# Altium PCB 遥控器.PcbDoc
Units mm, origin at the board's own origin, x right, y up, seen from the top; angles counter-clockwise.
Board outline 152.4 x 101.6 mm, 2 copper layers (Top Layer, Bottom Layer); 65 components, 58 nets, 276 pads, 384 vias.
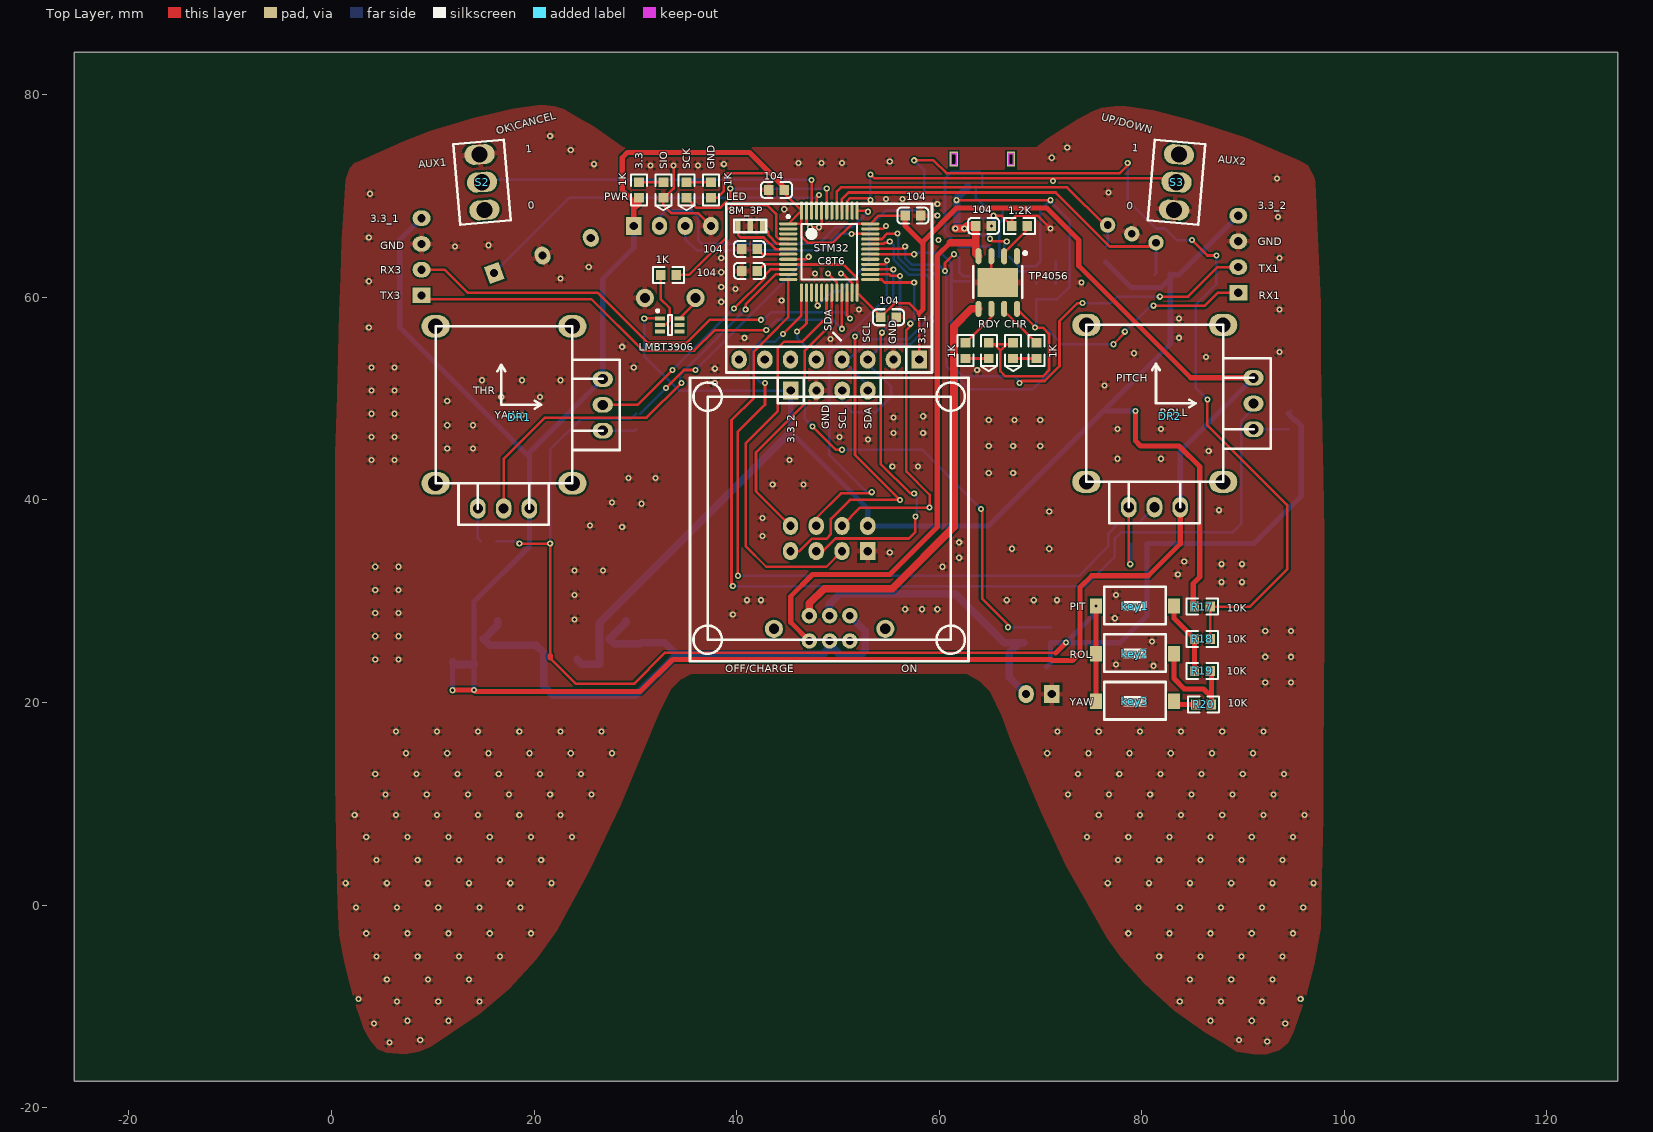
[diagram p0: Top Layer view]
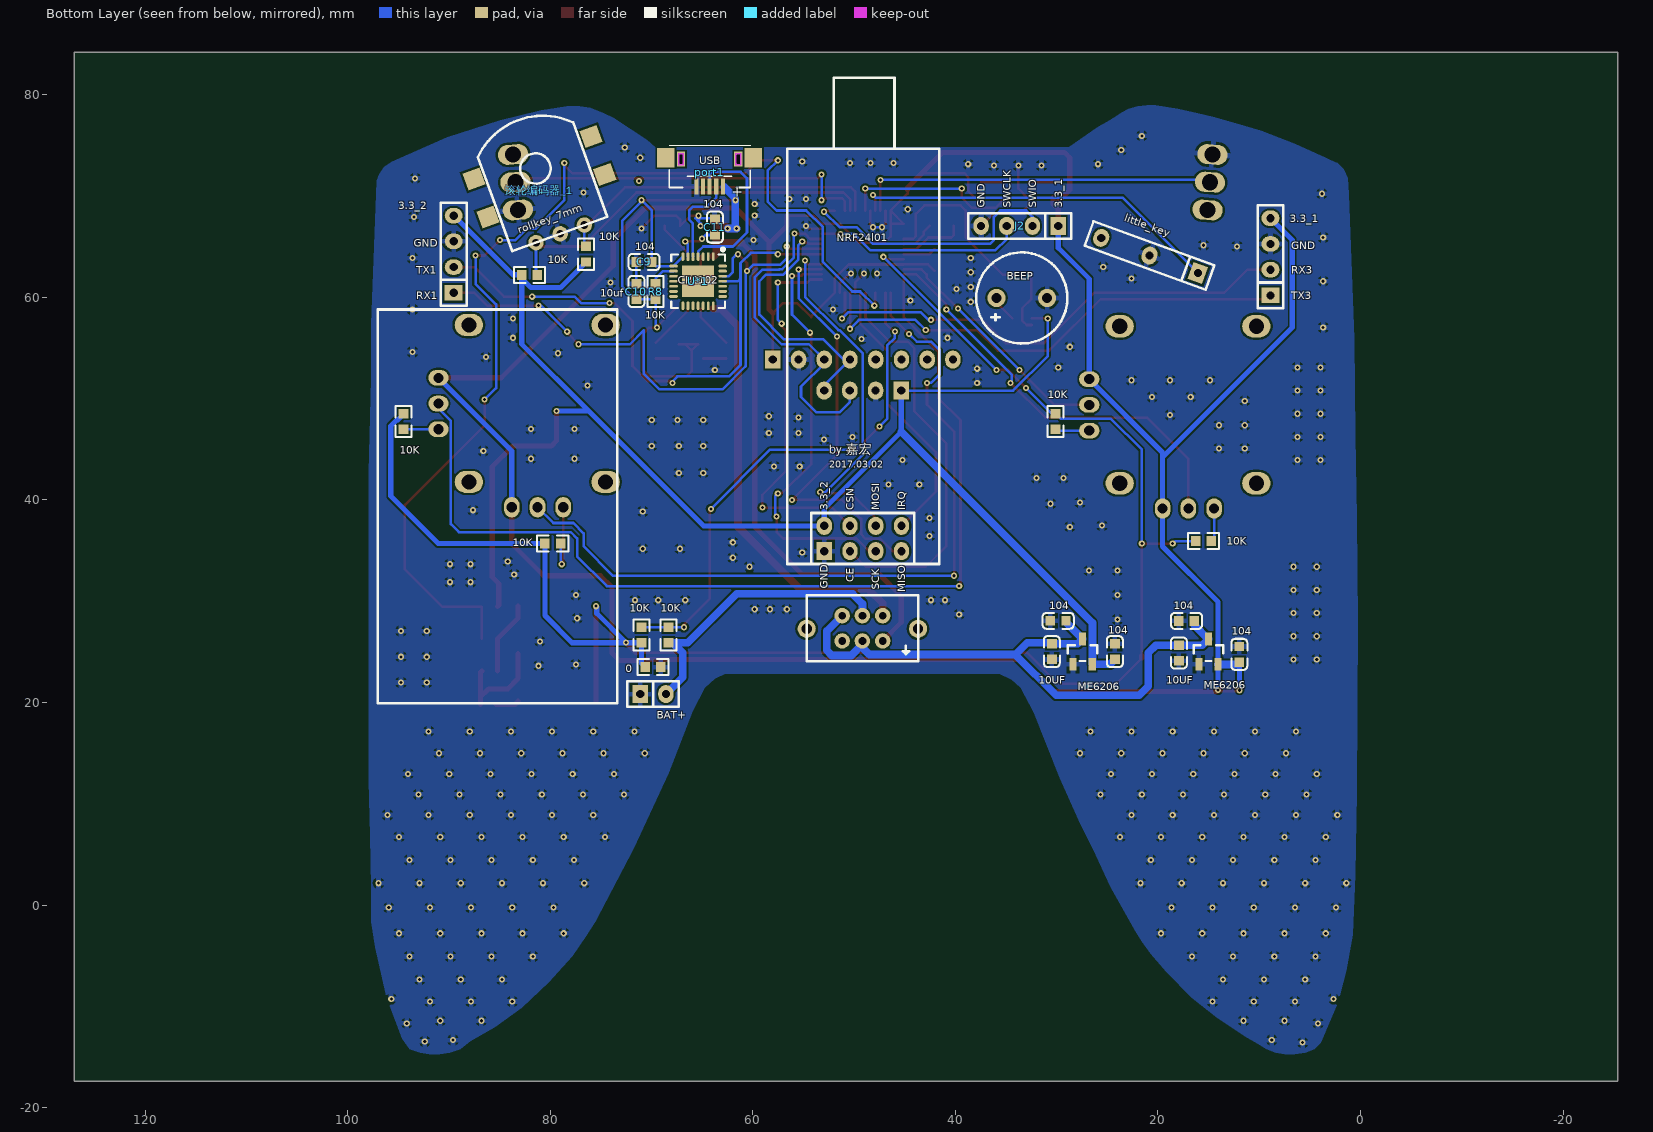
[diagram p1: Bottom Layer view, seen from below]
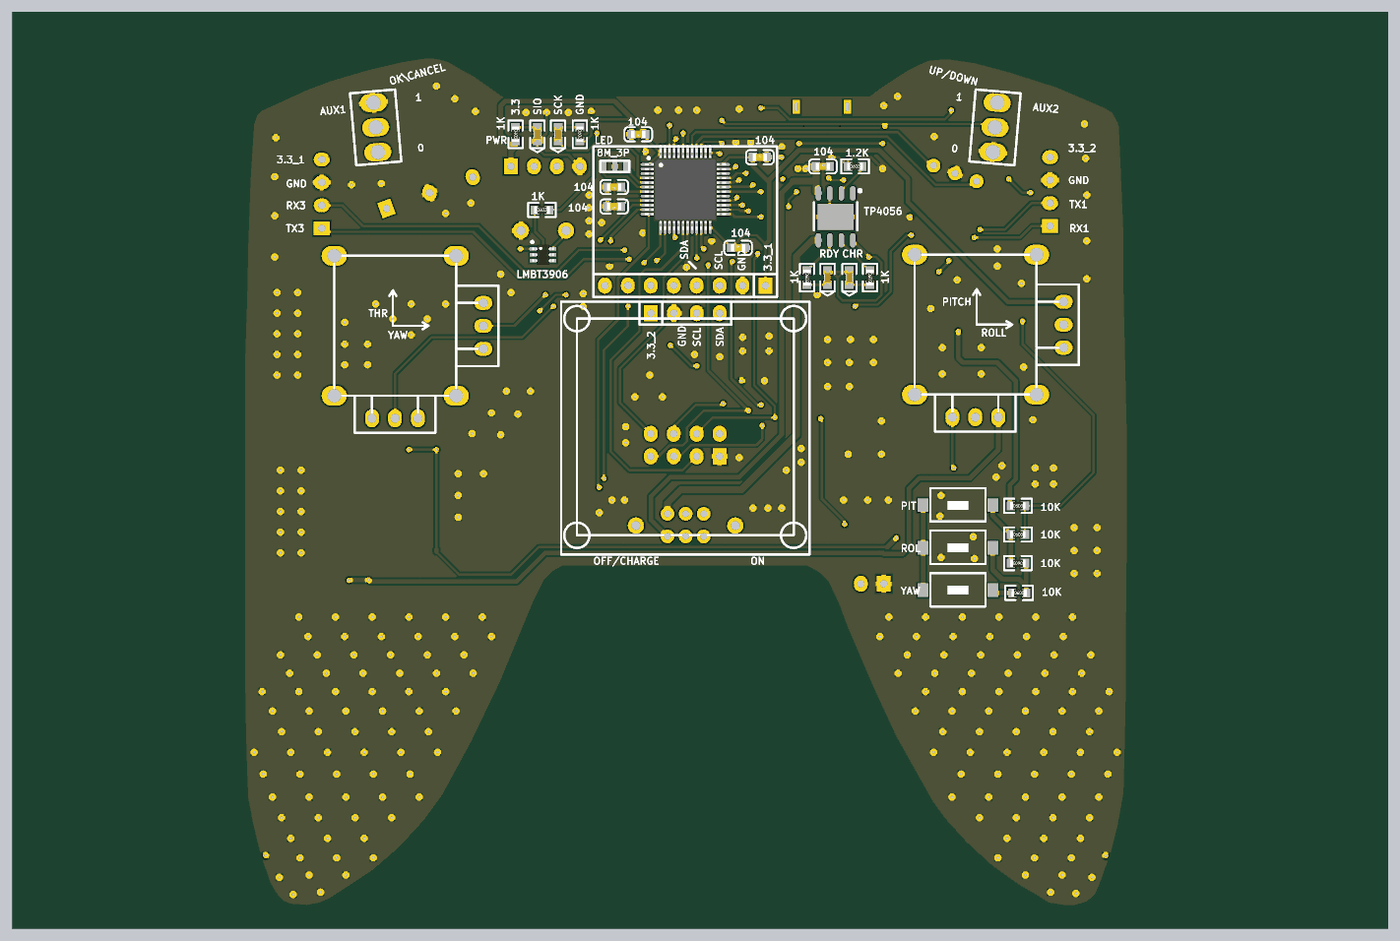
[diagram p2: 3D render of the assembled board from above, using the file's embedded part models]
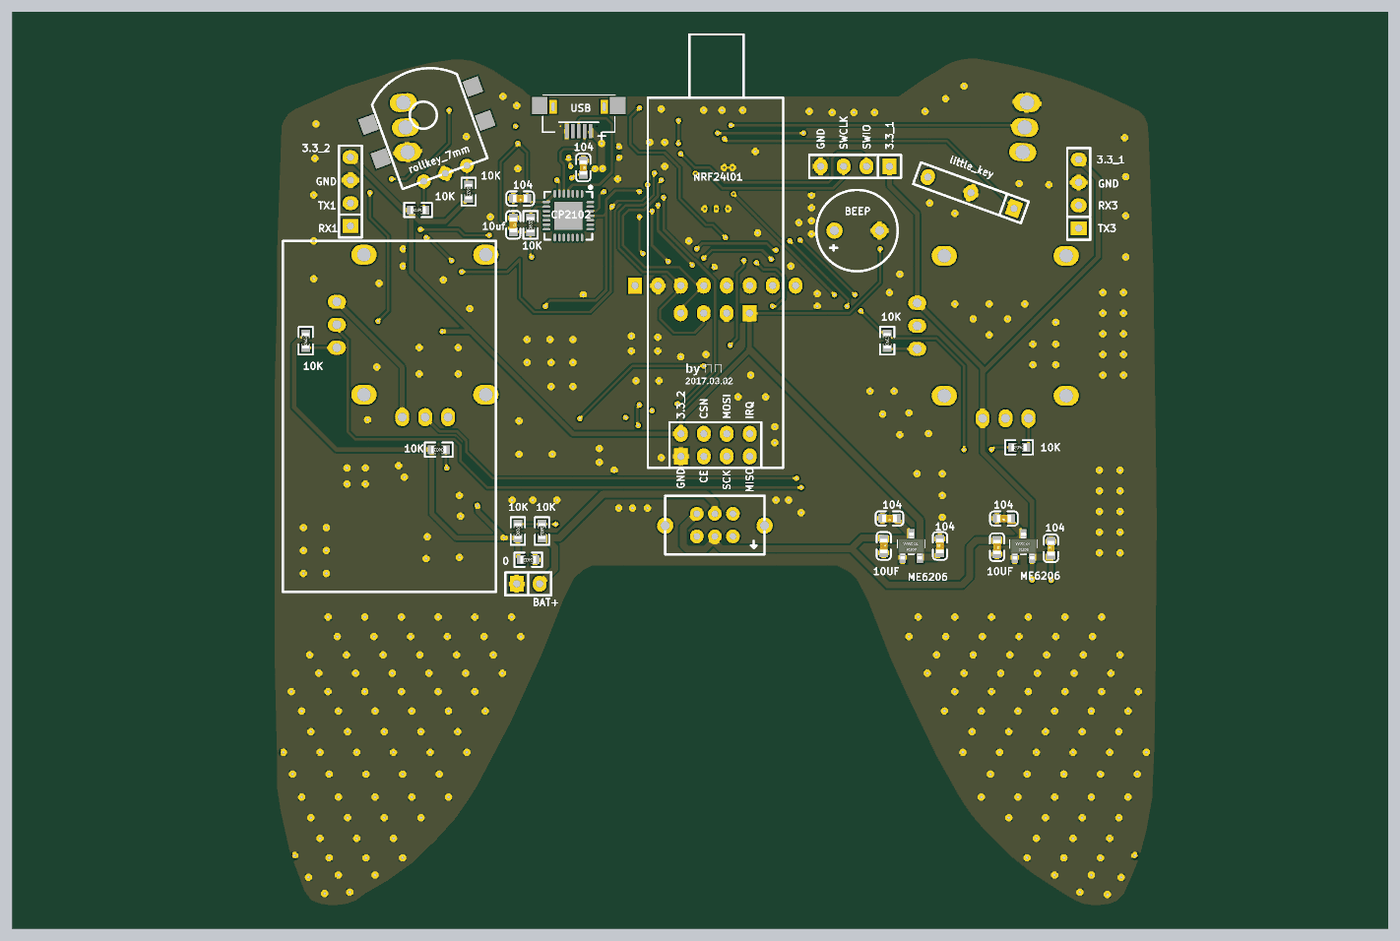
[diagram p3: 3D render of the assembled board from below, using the file's embedded part models]

## Layer stack, top to bottom
Top Layer: signal copper 0.0356
Dielectric: dielectric 0.32, FR-4, Dk 4.8
Bottom Layer: signal copper 0.0356

## Board outline
-25.4,-17.399 127,-17.399 127,84.201 -25.4,84.201

## Design rules (kind name [scope] priority, off if disabled: settings)
Clearance [All vs InPolygon] p1: gap=0.2
MinimumSolderMaskSliver [All] p1: minsoldermaskwidth=0
PolygonConnect [All] p1: connectstyle=Relief reliefconductorwidth=0.508 reliefentries=4 polygonreliefangle="90 Angle" airgapwidth=0.254
RoutingVias [All] p1: holewidth=0.305 width=0.61 viastyle="Through Hole" minholewidth=0.305 minwidth=0.61 maxholewidth=0.305 maxwidth=0.61
SilkToSilkClearance [All] p1: silktosilkclearance=0
SilkToSolderMaskClearance [IsPad] p1: minsilkscreentomaskgap=0 clearancetoexposedcopper=TRUE
SolderMaskExpansion [All] p1: expansion=0.102
Width [All] p1: maxlimit=0.762 minlimit=0.254 preferedwidth=0.254
25 further rules are at their usual default settings.

## Components (designator, comment, footprint, x,y, rotation, side; value= is the part's Value field where it differs from the comment)
1 "LED" LC-0603_LED_S3 64.897,54.737 r90 top
2 "LED" LC-0603_LED_S3 67.31,54.737 r90 top
3 "LED" LC-0603_LED_S3 32.766,70.612 r90 top
4 "LED" LC-0603_LED_S3 35.052,70.612 r90 top
*1 "TP4056" LC-SOP-8_EP_150mil 65.786,61.468 r180 top
b1 "BELL" bell_d5 35.941,59.944 r180 bottom
C1 "Cap Pol2" LC-0603_C 29.845,28.067 r0 bottom
C2 "Cap" LC-0603_C 30.48,25.019 r270 bottom
C3 "Cap" LC-0603_C 11.966,24.757 r90 bottom
C4 "Cap" LC-0603_C 64.389,67.056 r0 top
C6 "Cap Pol2" LC-0603_C 17.173,28.059 r0 bottom
C7 "Cap" LC-0603_C 17.935,24.884 r270 bottom
C8 "Cap" LC-0603_C 24.257,25.019 r90 bottom
C9 "104" LC-0603_C 70.739,63.5 r0 bottom
C10 "1uf" LC-0603_C 71.501,60.579 r270 bottom
C11 "Cap" LC-0603_C 41.275,64.77 r180 top
C11 "Cap" LC-0603_C 63.754,66.929 r270 bottom
C12 "Cap" LC-0603_C 43.942,70.612 r180 top
C13 "Cap" LC-0603_C 41.275,62.611 r180 top
C14 "Cap" LC-0603_C 57.404,68.072 r0 top
C15 "Cap" LC-0603_C 54.991,58.039 r0 top
D1 "me6206" LC-SOT-23(SOT-23-3) 15.014,25.011 r270 bottom
D2 "me6206" LC-SOT-23(SOT-23-3) 27.432,25.019 r270 bottom
DR1 "摇杆电位器" 摇杆电位器 19.558,39.751 r0 top
DR2 "摇杆电位器" 摇杆电位器 83.82,39.878 r0 top
J1 "CON2" SIP2 69.85,20.828 r180 bottom
J2 "CON4" SIP4 33.655,67.056 r0 bottom
J3 "CON4" SIP4 89.535,64.262 r90 bottom
J4 "CON4" SIP4 8.89,64.008 r90 bottom
key1 "KEY" 贴片按键6.1x3.7 79.883,29.718 r180 top
key2 "KEY" 贴片按键6.1x3.7 79.883,25.019 r180 top
key3 "KEY" 贴片按键6.1x3.7 79.883,20.32 r180 top
mpu1 "CON8" MPU6050模块 44.323,46.355 r180 top
nrf1 "nrf24l01" nrf模块（带天线） 53.213,34.671 r180 bottom
oled_1 "CON4" oled_i2c_0.96 45.339,50.8 r0 top
port1 "micro_USB" MICRO-USB 64.262,73.152 r0 bottom
Q1 "PNP" LC-SC-70-6(SOT-363) 33.401,57.277 r180 top
R1 "Res2" LC-0603_R 67.945,67.056 r0 top
R2 "Res2" LC-0603_R 68.326,26.67 r270 bottom
R3 "Res2" LC-0603_R 62.611,54.737 r270 top
R4 "Res2" LC-0603_R 70.993,26.67 r90 bottom
R5 "Res2" LC-0603_R 69.596,54.737 r270 top
R6 "Res2" LC-0603_R 30.353,70.612 r270 top
R7 "Res2" LC-0603_R 69.85,23.495 r0 bottom
R8 "10K" LC-0603_R 69.596,60.579 r90 bottom
R9 "Res2" LC-0603_R 37.465,70.612 r270 top
R10 "Res2" LC-0603_R 33.274,62.23 r0 top
R11 "Res2" LC-0603_R 82.042,62.23 r0 bottom
R12 "Res2" LC-0603_R 76.454,64.262 r270 bottom
R13 "Res2" LC-0603_R 15.494,35.941 r0 bottom
R14 "Res2" LC-0603_R 30.099,47.752 r90 bottom
R15 "Res2" LC-0603_R 79.756,35.687 r0 bottom
R16 "Res2" LC-0603_R 94.488,47.752 r90 bottom
R17 "10K" LC-0603_R 85.979,29.464 r0 top
R18 "10K" LC-0603_R 85.979,26.289 r0 top
R19 "10K" LC-0603_R 85.979,23.114 r180 top
R20 "10K" LC-0603_R 86.106,19.812 r0 top
S1 "双刀双柄开关" 开关双联六脚 51.181,28.575 r180 bottom
S2 "双刀单柄开关" 二段开关8x5mm 14.859,71.374 r95 top
S3 "双刀单柄开关" 二段开关8x5mm 83.439,71.374 r265 top
S4 "微动开关" 微动开关 19.05,66.04 r20 bottom
U1 "STM32F103C8T6" LQFP48_N 49.149,64.516 r0 top
U*1 "CP2102" LC-QFN-28_5x5x05P 65.405,61.595 r0 bottom
X1 "XTAL" 三脚晶振 42.545,67.056 r180 top
滚轮编码器_1 "滚轮编码器_7mm" 滚轮编码器 81.407,65.405 r160 bottom

## Footprints (in the part's own frame and the unit in brackets; to place one, negate y for a bottom-side part, rotate by r counter-clockwise, add the part's x,y. Pads: shape width x height; smd on the part's side, far side on the other; paste and mask are expansions set on the pad)
bell_d5 [mm]
  round 1.8 hole 1: 1(0,0) 2(5,0)
  silkscreen extent -2,-4.5 7,4.5
LC-0603_C [mm]
  rect 0.93x0.98 smd: 1(-0.77,0) 2(0.77,0)
  silkscreen extent -1.53,-0.79 1.54,0.79, body extent -0.8,-0.4 0.8,0.4, height 0.3
LC-0603_LED_S3 [mm]
  rect 0.93x0.98 smd: A(0.77,0) K(-0.77,0)
  silkscreen extent -2,-0.79 1.53,0.79, body extent -0.8,-0.4 0.8,0.4, height 0.6
LC-0603_R [mm]
  rect 0.93x0.98 smd: 1(-0.77,0) 2(0.77,0)
  silkscreen extent -1.53,-0.79 1.54,0.79, body extent -0.85,-0.4 0.85,0.4, height 0.56
LC-QFN-28_5x5x05P [mm]
  rect 3.13x3.13 smd mask+0.051: 0(0,0)
  oval 0.28x0.85 smd mask+0.051: 1(-1.5,-2.425) 2(-1,-2.425) 3(-0.5,-2.425) 4(0,-2.425) 5(0.5,-2.425) 6(1,-2.425) 7(1.5,-2.425) 15(1.5,2.425) 16(1,2.425) 17(0.5,2.425) 18(0,2.425) 19(-0.5,2.425) 20(-1,2.425) 21(-1.5,2.425)
  oval 0.85x0.28 smd mask+0.051: 8(2.425,-1.5) 9(2.425,-1) 10(2.425,-0.5) 11(2.425,0) 12(2.425,0.5) 13(2.425,1) 14(2.425,1.5) 22(-2.425,1.5) 23(-2.425,1) 24(-2.425,0.5) 25(-2.425,0) 26(-2.425,-0.5) 27(-2.425,-1) 28(-2.425,-1.5)
  silkscreen extent -2.65,-3.3 2.65,2.65
LC-SC-70-6(SOT-363) [mm]
  rect 1x0.42 smd mask+0.051: 1(0.97,-0.65) 2(0.97,0) 3(0.97,0.65) 4(-0.97,0.65) 5(-0.97,0) 6(-0.97,-0.65)
  silkscreen extent -0.2,-1.52 1.32,1, body extent -1.2,-1.1 1.2,1.1, height 1.1
LC-SOP-8_EP_150mil [mm]
  rect 4x2.9 smd: 0(0,0)
  oval 0.6x1.6 smd: 1(-1.905,-2.6) 2(-0.635,-2.6) 3(0.635,-2.6) 4(1.905,-2.6) 5(1.905,2.6) 6(0.635,2.6) 7(-0.635,2.6) 8(-1.905,2.6)
  silkscreen extent -2.85,-3.05 2.4,1.5
LC-SOT-23(SOT-23-3) [mm]
  rect 1.25x0.7 smd: 1(1.25,-0.95) 2(1.25,0.95) 3(-1.25,0)
  silkscreen extent -0.65,-1.46 0.9,1.46, body extent -1.5,-1.5 1.5,1.5, height 1.3
LQFP48_N [mm]
  oval 1.8x0.3 smd: 1(-4.05,2.75) 2(-4.05,2.25) 3(-4.05,1.75) 4(-4.05,1.25) 5(-4.05,0.75) 6(-4.05,0.25) 7(-4.05,-0.25) 8(-4.05,-0.75) 9(-4.05,-1.25) 10(-4.05,-1.75) 11(-4.05,-2.25) 12(-4.05,-2.75) 25(4.05,-2.75) 26(4.05,-2.25) 27(4.05,-1.75) 28(4.05,-1.25) 29(4.05,-0.75) 30(4.05,-0.25) 31(4.05,0.25) 32(4.05,0.75) 33(4.05,1.25) 34(4.05,1.75) 35(4.05,2.25) 36(4.05,2.75)
  oval 0.3x1.8 smd: 13(-2.75,-4.05) 14(-2.25,-4.05) 15(-1.75,-4.05) 16(-1.25,-4.05) 17(-0.75,-4.05) 18(-0.25,-4.05) 19(0.25,-4.05) 20(0.75,-4.05) 21(1.25,-4.05) 22(1.75,-4.05) 23(2.25,-4.05) 24(2.75,-4.05) 37(2.75,4.05) 38(2.25,4.05) 39(1.75,4.05) 40(1.25,4.05) 41(0.75,4.05) 42(0.25,4.05) 43(-0.25,4.05) 44(-0.75,4.05) 45(-1.25,4.05) 46(-1.75,4.05) 47(-2.25,4.05) 48(-2.75,4.05)
  silkscreen extent -4.17,-2.75 2.75,3.57, body extent -4.5,-4.51 4.5,4.49, height 1.56
MICRO-USB [mm]
  rect 0.4x1.55 smd: 1(-1.3,2.2) 2(-0.65,2.2) 3(0,2.2) 4(0.65,2.2) 5(1.3,2.2)
  rect 1.724x1.9 smd: 6(-4.318,-0.635) 6(4.318,-0.635)
  rect 0.8x1.5 hole 0.4 slot 1 at 90 deg: 6(-2.825,-0.5) 6(2.825,-0.5)
  round 0 all layers, no hole: ""(-2,1.65) ""(2,1.65)
  Keep-Out Layer lines w0.127: -3.054,0.075 -3.054,-1.043 -2.596,-1.043 -2.596,0.075 -3.054,0.075 ; 2.596,0.075 2.596,-1.043 3.054,-1.043 3.054,0.075 2.596,0.075
  silkscreen extent -4.05,-1.8 4,2.3
MPU6050模块 [mil]
  rect 60x70 hole 32: 1(-539.37,-295.28)
  oval 60x70 hole 32: 2(-439.37,-295.28) 3(-339.37,-295.28) 4(-239.37,-295.28) 5(-139.37,-295.28) 6(-39.37,-295.28) 7(60.63,-295.28) 8(160.63,-295.28)
  silkscreen extent -589,-902 211,-245
nrf模块（带天线） [mil]
  rect 60x70 hole 32: 1(10.63,10.63)
  oval 60x70 hole 32: 2(10.63,109.06) 3(110.63,10.63) 4(110.63,109.06) 5(210.63,10.63) 6(210.63,109.06) 7(310.63,10.63) 8(310.63,109.06)
  silkscreen extent -134,-39 457,1850
oled_i2c_0.96 [mil]
  rect 60x70 hole 32: 1(0,0)
  oval 60x70 hole 32: 2(100,0) 3(200,0) 4(300,0)
  silkscreen extent -391,-1052 691,50
SIP2 [mil]
  rect 60x70 hole 32: 1(-50,0)
  oval 60x70 hole 32: 2(50,0)
  silkscreen extent -100,-50 100,50
SIP4 [mil]
  rect 60x70 hole 32: 1(-150,0)
  oval 60x70 hole 32: 2(-50,0) 3(50,0) 4(150,0)
  silkscreen extent -200,-50 200,50
三脚晶振 [mm]
  rect 0.5x1.3 smd: 1(0,0) 2(2.4,0) 3(1.2,0)
  silkscreen extent -0.4,-0.63 2.8,0.63
二段开关8x5mm [mm]
  oval 2x3 hole 1.6: 1(0,0) 2(-2.75,0) 3(2.75,0)
  silkscreen extent -4,-2.5 4,2.5
开关双联六脚 [mil]
  round 60 hole 30: 1(78.74,0) 2(0,0) 3(157.48,0) 4(0,-98.43) 5(78.74,-98.43) 6(157.48,-98.43)
  round 70.87 hole 39.37: ""(-137.8,-51.18) ""(295.28,-51.18)
  silkscreen extent -138,-177 295,79
微动开关 [mil]
  rect 60x70 hole 32: 1(-159.84,94.49)
  oval 60x70 hole 32: 2(40.16,94.49) ""(240.16,94.49)
  silkscreen extent -210,44 290,144
摇杆电位器 [mm]
  oval 2x1.54 hole 1: 1(7.22,12.18) 2(7.22,9.64) 3(7.22,7.1)
  oval 1.54x2 hole 1: 4(-0.02,-0.6) 5(-2.56,-0.6) 6(-5.1,-0.6)
  oval 2.8x2.2 hole 1.5: ""(-9.28,1.9) ""(-9.28,17.4) ""(4.22,1.9) ""(4.22,17.4)
  silkscreen extent -9.28,-2.2 8.9,17.4
滚轮编码器 [mm]
  round 1.524 hole 0.762: 1(0,0) 2(2.54,0) 3(5.08,0)
  rect 1.8x1.8 smd: ""(-3.6,8) ""(-3.6,4) ""(8.68,4) ""(8.68,8)
  silkscreen extent -2.5,0 7.5,11.97
贴片按键6.1x3.7 [mm]
  rect 1.2x1.5 smd: 1(-3.3,0.2) 2(4.4,0.2)
  silkscreen extent -2.5,-1.7 3.6,2

## Part data
C1 C6: "Polarized Capacitor (Axial)"
C2 C3 C4 C7 C8 C11 C11 C12 C13 C14 C15: "Capacitor"
C9 C10: library part CAP
mpu1: library part mpu6050模块
oled_1: library part oled_0.96_i2c
R1 R2 R3 R4 R5 R6 R7 R9 R10 R11 R12 R13 R14 R15 R16: "Resistor"
R8 R17 R18 R19 R20: library part RES
U1: "STM32 ARM-based 32-bit MCU with 64 Kbytes Flash, 48-pin LQFP, Industrial Temperature"
U*1: "USBtoTTL"
X1: library part XTAL_3P

## Via types
v1: diameter 0.61, hole 0.305, Top Layer to Bottom Layer, 384 vias

## Nets (pads, with @x,y where several pads share a name; then routed paths per layer and width w, separated by ;. In a path a pad name is that pad's centre, name@x,y a point inside that pad or via, vN(x,y) a via of type N, cw(c..) or ccw(c..) an arc to the next point about the centre after c; other vN are vias at no path point)
3V3_1: C3.1 C12.1 C13.1 C14.1 C15.1 D1.2 DR1.1 DR1.4 DR2.1 DR2.4 J2.1 J4.4 mpu1.1 R6.2 R9.2 U1.1 U1.9 U1.24 U1.36 U1.48 | length 320.6
  Top Layer w0.254: R9.2 38.092,69.842 38.735,70.485 38.735,71.882 39.116,72.263 43.18,72.263 43.243,72.326 ; C13.1 42.7,63.266 U1.9 45.119,63.246 50.546,63.246 51.899,61.893 U1.24 54.221,58.144 C15.1 55.618,59.436 57.023,59.436 58.023,58.436 mpu1.1 ; C12.1 44.712,70.253 U1.48 ; C14.1 54.005,68.072 U1.36 51.391,67.266 49.53,65.405 46.99,65.405 46.399,65.996 46.399,67.281 ; 46.399,67.281 46.384,67.266 U1.1 U1.48 ; 46.399,67.281 U1.48
  Top Layer w0.508: v1(11.938,21.209) 11.971,21.242 v1(14.064,21.242) 14.224,21.082 30.48,21.082 33.655,24.257 71.027,24.257 71.154,24.13 73.152,24.13 73.914,24.892 73.914,31.369 75.057,32.512 80.645,32.512 83.8,35.667 DR2.4 ; J2.1@29.845,66.929 J2.1 29.845,68.707 ; R6.2 30.353,69.215 29.845,68.707 ; C12.1 44.712,70.858 43.243,72.326 41.275,74.295 29.21,74.295 28.702,73.787 28.702,70.596 29.845,69.453 29.845,68.707 ; C14.1 56.634,67.064 58.42,65.278 ; 58.023,58.436 58.42,58.833 58.42,65.278 ; DR2.1 84.848,52.058 73.787,63.119 73.787,65.659 70.612,68.834 61.722,68.834 58.42,65.532 58.42,65.278
  Bottom Layer w0.508: J4.4 6.731,65.659 6.731,57.023 19.538,44.216 ; v1(11.938,21.209) 11.938,23.959 C3.1 ; D1.2@14.052,23.773 14.052,29.927 19.538,35.413 DR1.4 19.538,44.216 ; v1(14.064,21.242) D1.2 ; J2.1@29.845,66.929 29.845,64.897 26.778,61.83 DR1.1 19.538,44.691 19.538,44.216 ; DR2.4 83.8,44.818 DR2.1
  Bottom Layer w0.762: C3.1 12.192,23.761 D1.2 D1.2@14.052,23.773
3V3_2: C8.1 D2.2 J3.4 nrf1.2 oled_1.1 Q1.1 R11.2 R12.2 R17.1 | length 159.8
  Top Layer w0.254: v1(30.876,57.927) Q1.1
  Top Layer w0.508: v1(79.375,48.768) 79.375,45.847 79.883,45.339 83.693,45.339 85.725,43.307 85.725,32.385 85.09,31.75 85.09,29.583 R17.1
  Bottom Layer w0.254: v1(30.876,57.927) 30.876,54.214 34.29,50.8 oled_1.1
  Bottom Layer w0.508: oled_1.1 45.339,46.736 52.943,39.132 nrf1.2 64.873,37.441 76.2,48.768 ; R12.2 78.986,60.96 81.915,60.96 83.185,62.23 83.693,62.23 J3.4 ; v1(79.375,48.768) 76.2,48.768 ; R11.2@82.812,62.287 82.812,55.38 76.2,48.768
  Bottom Layer w0.762: C8.1 24.737,23.769 D2.2 26.47,23.781 26.47,27.867 45.339,46.736
ADC_KEY: R17.2 R18.2 U1.16 | length 107.4
  Top Layer w0.254: U1.16 47.899,59.289 v1(48.006,59.182) ; v1(57.531,73.533) 59.436,73.533 60.706,72.263 77.851,72.263 78.613,73.025 v1(78.613,73.279) ; v1(84.963,65.659) 86.487,64.135 v1(87.376,64.135) ; v1(86.487,49.911) 86.487,47.371 94.361,39.497 94.361,33.147 90.678,29.464 R17.2 R18.2
  Bottom Layer w0.254: v1(48.006,59.182) 49.403,60.579 50.165,60.579 53.086,63.5 53.086,66.929 54.737,68.58 57.658,68.58 58.547,69.469 58.547,72.517 v1(57.531,73.533) ; v1(78.613,73.279) 78.613,69.596 81.407,66.802 82.296,66.802 83.439,65.659 v1(84.963,65.659) ; v1(86.487,49.911) 85.344,51.054 85.344,59.309 87.376,61.341 v1(87.376,64.135)
ADC_PITCH: DR2.2 U1.12 | length 98.8
  Top Layer w0.254: v1(39.624,31.496) 39.497,31.623 39.497,47.879 41.694,50.076 41.694,54.648 43.183,56.137 43.188,56.137 45.099,58.049 U1.12
  Bottom Layer w0.254: v1(39.624,31.496) 74.422,31.496 77.343,34.417 77.343,36.195 77.978,36.83 89.027,36.83 89.813,37.616 89.813,47.814 91.04,49.041 DR2.2
ADC_POWER: R2.1 R4.2 U1.14 | length 51.5
  Top Layer w0.254: v1(45.974,56.642) 45.974,56.515 46.899,57.44 U1.14 ; v1(47.498,47.244) 49.784,44.958 v1(50.419,44.958) ; v1(64.135,39.116) 64.262,38.989 64.262,30.226 66.802,27.686 v1(66.802,27.432)
  Bottom Layer w0.254: v1(45.974,56.642) 45.974,56.007 46.736,55.245 46.736,48.006 v1(47.498,47.244) ; v1(50.419,44.958) 58.293,44.958 v1(64.135,39.116) ; v1(66.802,27.432) 66.81,27.44 R2.1 R4.2
ADC_ROLL: DR2.5 U1.13 | length 77.3
  Top Layer w0.254: v1(40.132,32.512) 40.132,46.736 42.799,49.403 v1(42.799,51.562) ; v1(44.577,56.388) 46.399,58.21 U1.13
  Bottom Layer w0.254: v1(40.132,32.512) 73.787,32.512 76.708,35.433 76.708,36.703 77.724,37.719 79.701,37.719 DR2.5 ; v1(42.799,51.562) 42.418,51.562 41.529,52.451 41.529,54.737 42.418,55.626 43.815,55.626 v1(44.577,56.388)
ADC_THR: DR1.2 U1.10 | length 24
  Top Layer w0.254: DR1.2 30.214,49.391 v1(33.655,52.832) ; v1(39.751,58.9) 42.837,61.986 42.837,62.268 43.335,62.766 U1.10
  Bottom Layer w0.254: v1(33.655,52.832) 33.683,52.832 v1(39.751,58.9)
ADC_YAW: DR1.5 U1.11 | length 41.5
  Top Layer w0.254: DR1.5 17.018,39.171 17.018,44.069 21.082,48.133 31.115,48.133 v1(34.544,51.562) ; v1(40.894,58.801) 40.894,59.309 43.851,62.266 U1.11
  Bottom Layer w0.254: v1(34.544,51.562) 34.417,51.689 34.417,52.324 v1(40.894,58.801)
AGND: key1.2 key2.2 key3.2 R4.1 R7.2 R13.2 R14.2 R15.2 R16.2 U1.8 | length 175.8
  Top Layer w0.254: v1(18.542,35.687) v1(21.59,35.687) 21.59,24.638 ; 21.59,24.384 24.13,21.844 29.845,21.844 32.893,24.892 71.501,24.892 ; v1(33.02,51.054) 34.798,52.832 v1(35.941,52.832) ; U1.8 46.875,63.766 v1(47.117,64.008)
  Top Layer w0.508: 21.59,24.384 21.59,24.638 ; 71.501,24.892 v1(72.517,25.908) ; key3.2 key2.2 v1(75.483,29.509) key1.2
  Bottom Layer w0.254: R13.2 18.288,35.941 v1(18.542,35.687) ; v1(21.59,35.687) 21.59,44.958 24.638,48.006 29.583,48.006 R14.2 ; R14.2@30.488,48.522 v1(33.02,51.054) ; v1(35.941,52.832) v1(47.117,64.008) ; R16.2@94.431,48.522 R16.2@94.742,48.833
  Bottom Layer w0.508: R7.2 70.993,23.868 R4.1 77.843,25.9 80.526,28.583 R15.2 91.059,35.687 95.758,40.386 95.758,47.309 95.166,47.901 95.052,47.901 94.431,48.522 R16.2 ; v1(72.517,25.908) 75.416,28.807 75.416,29.442 v1(75.483,29.509)
AUXKEY_L: S2.1 U1.46 | length 35.7
  Top Layer w0.254: U1.46 v1(47.399,71.6)
  Bottom Layer w0.254: S2.1 15.113,71.628 47.371,71.628 v1(47.399,71.6)
AUXKEY_R: S3.1 U1.39 | length 36.4
  Top Layer w0.254: U1.39 50.922,68.589 50.922,69.514 51.201,69.793 v1@53.156,69.793 ; v1(53.213,72.136) 53.594,71.755 83.058,71.755 S3.1
  Bottom Layer w0.254: v1(53.213,69.596) v1(53.213,72.136)
  other v1: 71.247,71.501
BALLKEY_PIN1: R11.1 U1.40 滚轮编码器_1.1 | length 38
  Top Layer w0.254: U1.40 50.399,69.696 51.058,70.354 71.505,70.354 76.835,65.024 81.026,65.024 滚轮编码器_1.1
  Bottom Layer w0.254: R11.1 81.407,62.365 滚轮编码器_1.1
BALLKEY_PIN2: R12.1 U1.41 滚轮编码器_1.3 | length 32.5
  Top Layer w0.254: U1.41 49.899,70.473 50.292,70.866 72.644,70.866 76.368,67.142 滚轮编码器_1.3
  Bottom Layer w0.254: R12.1 76.633,65.211 滚轮编码器_1.3
BEEP: R10.2 U1.4 | length 18.1
  Top Layer w0.254: R10.2 35.306,62.23 38.989,65.913 38.989,68.58 39.497,69.088 43.053,69.088 43.894,68.247 43.894,66.046 44.151,65.789 45.076,65.789 U1.4
CBAT: *1.5 S1.3 | length 41.6
  Top Layer w0.762: S1.3 47.181,29.782 48.641,31.242 55.372,31.242 61.468,37.338 61.468,57.15 63.186,58.868 *1.5
D+: port1.3 U*1.4 | length 16.7
  Bottom Layer w0.254: port1.3 64.262,72.136 64.008,72.39 61.214,72.39 60.579,71.755 60.579,66.421 61.976,65.024 64.897,65.024 65.405,64.516 U*1.4
D-: port1.2 U*1.5 | length 9
  Bottom Layer w0.254: port1.2 63.612,69.865 64.516,68.961 65.913,68.961 66.294,68.58 66.294,67.691 65.913,67.31 65.913,64.028 U*1.5
GND: 3.K *1.0 *1.3 b1.2 C1.2 C2.2 C3.2 C4.2 C6.2 C7.2 C8.2 C9.2 C10.1 C11.1@63.754,67.699 C11.2@40.505,64.77 C12.2 C13.2 C14.2 C15.2 D1.1 D2.1 J1.1 J2.4 J3.3 J4.3 mpu1.2 nrf1.1 oled_1.2 port1.5 R1.1 R7.1 S2.3 S3.3 S4.2 U1.20 U1.23 U1.35 U1.44 U1.47 X1.3 滚轮编码器_1.2 | length 36.8
  Top Layer w0.254: v1(33.782,73.025) 33.782,70.731 32.766,69.715 32.766,69.088 33.528,68.326 36.195,68.326 J2.4 ; U1.47 46.899,67.274 v1(47.244,66.929) v1(48.133,66.929) 48.399,67.195 U1.44 ; v1(49.022,62.357) 49.899,61.48 U1.20 ; v1(50.292,62.357) 50.419,62.23 50.608,62.23 51.399,61.439 U1.23 ; U1.35 54.447,66.766 v1(54.737,67.056) ; *1.3 65.151,62.103 *1.0 ; v1(65.379,68.062) 66.169,68.062 R1.1 67.183,67.064 67.183,67.691 67.564,68.072 69.723,68.072 v1(70.993,66.802)
  Bottom Layer w0.254: v1(47.244,66.929) v1(48.133,66.929) ; v1(49.022,62.357) v1@49.022,62.484 ; C11.1@64.008,67.826 65.143,67.826 65.379,67.59 ; v1@65.151,67.31 65.405,67.564 ; v1(65.379,68.062) 65.379,67.59 ; 65.667,67.826 65.405,67.564 ; C10.1 71.501,63.492 C9.2 ; 65.379,67.59 65.405,67.564
  other v1: 5.715,-13.589 92.393,-13.468 8.763,-13.335 89.599,-13.335 4.191,-11.684 94.171,-11.684 7.493,-11.43 11.557,-11.43 86.805,-11.43 90.869,-11.43 6.477,-9.525 10.541,-9.525 14.605,-9.525 83.757,-9.525 87.821,-9.525 91.885,-9.525 2.667,-9.271 95.695,-9.271 5.461,-7.366 9.525,-7.366 13.589,-7.366 84.773,-7.366 88.837,-7.366 92.901,-7.366 4.445,-5.08 8.509,-5.08 12.573,-5.08 16.637,-5.08 81.725,-5.08 85.789,-5.08 89.853,-5.08 93.917,-5.08 3.429,-2.794 7.493,-2.794 11.557,-2.794 15.621,-2.794 19.685,-2.794 78.677,-2.794 82.741,-2.794 86.805,-2.794 90.869,-2.794 94.933,-2.794 2.413,-0.254 6.477,-0.254 10.541,-0.254 14.605,-0.254 18.669,-0.254 79.693,-0.254 83.757,-0.254 87.821,-0.254 91.885,-0.254 95.949,-0.254 1.397,2.159 5.461,2.159 9.525,2.159 13.589,2.159 17.653,2.159 21.717,2.159 76.645,2.159 80.709,2.159 84.773,2.159 88.837,2.159 92.901,2.159 96.965,2.159 4.445,4.445 8.509,4.445 12.573,4.445 16.637,4.445 20.701,4.445 77.661,4.445 81.725,4.445 85.789,4.445 89.853,4.445 93.917,4.445 3.429,6.731 7.493,6.731 11.557,6.731 15.621,6.731 19.685,6.731 23.749,6.731 74.613,6.731 78.677,6.731 82.741,6.731 86.805,6.731 90.869,6.731 94.933,6.731 2.286,8.89 6.35,8.89 10.414,8.89 14.478,8.89 18.542,8.89 22.606,8.89 75.756,8.89 79.82,8.89 83.884,8.89 87.948,8.89 92.012,8.89 96.076,8.89 5.334,10.922 9.398,10.922 13.462,10.922 17.526,10.922 21.59,10.922 25.654,10.922 72.708,10.922 76.772,10.922 80.836,10.922 84.9,10.922 88.964,10.922 93.028,10.922 4.318,12.954 8.382,12.954 12.446,12.954 16.51,12.954 20.574,12.954 24.638,12.954 73.724,12.954 77.788,12.954 81.852,12.954 85.916,12.954 89.98,12.954 94.044,12.954 7.366,14.986 11.43,14.986 15.494,14.986 19.558,14.986 23.622,14.986 27.686,14.986 70.676,14.986 74.74,14.986 78.804,14.986 82.868,14.986 86.932,14.986 90.996,14.986 6.35,17.145 10.414,17.145 14.478,17.145 18.542,17.145 22.606,17.145 26.67,17.145 71.692,17.145 75.756,17.145 79.82,17.145 83.884,17.145 87.948,17.145 92.012,17.145 92.202,21.971 94.742,21.971 81.153,23.622 77.47,23.749 4.318,24.257 6.604,24.257 92.202,24.511 94.742,24.511 81.026,26.035 4.318,26.543 6.604,26.543 92.202,27.051 94.742,27.051 24.003,28.194 77.343,28.321 39.624,28.702 4.318,28.829 6.604,28.829 56.642,29.21 58.293,29.21 59.817,29.21 41.021,30.099 42.418,30.099 66.675,30.099 69.342,30.099 71.628,30.099 24.003,30.607 77.47,30.607 4.318,31.115 6.604,31.115 87.884,31.877 89.916,31.877 83.566,32.639 24.003,33.02 26.797,33.02 4.318,33.401 6.604,33.401 60.325,33.401 87.884,33.655 89.916,33.655 84.201,33.909 61.976,34.29 55.118,34.798 67.183,35.179 70.866,35.179 61.976,35.814 42.545,36.449 28.702,37.338 25.527,37.465 42.545,38.227 70.866,38.862 87.63,38.989 30.607,39.624 27.686,39.751 43.561,41.529 46.609,41.529 29.337,42.164 32.004,42.164 64.897,42.672 67.31,42.672 55.372,43.307 57.912,43.307 3.937,43.942 6.223,43.942 45.212,43.942 77.597,44.069 81.915,44.069 86.614,44.831 11.43,45.085 13.97,45.085 64.897,45.339 67.31,45.339 69.977,45.339 52.959,45.974 3.937,46.228 6.223,46.228 50.165,46.228 55.499,46.609 58.42,46.609 77.597,46.99 81.915,46.99 11.43,47.371 13.97,47.371 64.897,47.879 67.437,47.879 69.977,47.879 55.499,48.133 58.42,48.26 18.796,48.387 3.937,48.514 6.223,48.514 11.43,49.784 16.764,50.165 20.574,50.165 3.937,50.8 6.223,50.8 76.327,51.308 37.846,51.562 14.859,51.816 18.796,51.816 22.606,51.816 63.754,52.832 37.846,52.959 3.937,53.086 6.223,53.086 29.845,53.086 86.36,54.102 79.248,54.483 93.599,54.61 28.702,55.118 49.276,55.88 40.767,56.007 83.693,56.007 3.683,57.023 83.693,57.912 52.07,58.801 93.599,58.801 38.481,59.563 44.45,59.69 39.878,60.833 38.481,61.025 74.041,61.468 3.683,61.595 22.606,61.849 47.752,62.357 38.481,62.484 25.4,62.992 38.481,63.881 93.599,63.881 12.192,65.024 15.494,65.151 59.944,65.659 3.683,65.913 65.151,67.056 93.472,67.945 59.817,68.072 44.704,68.707 59.817,69.215 54.737,69.723 56.388,69.723 3.81,70.231 76.708,70.358 93.345,71.755 31.496,73.025 36.195,73.025 25.908,73.152 38.735,73.152 46.101,73.279 48.387,73.279 50.419,73.279 55.118,73.406 71.12,73.787 23.622,74.549 72.644,74.803 21.59,75.946
LED: 4.K U1.43 | length 17.7
  Top Layer w0.254: 4.K 36.06,68.834 38.354,68.834 39.37,69.85 v1(39.37,70.739) ; v1(48.895,70.739) 48.899,70.735 U1.43
  Bottom Layer w0.254: v1(39.37,70.739) v1(48.895,70.739)
MISO: nrf1.7 U1.27 | length 42.3
  Top Layer w0.254: nrf1.7 46.196,34.941 47.412,36.157 48.857,36.157 49.314,36.614 49.314,38.138 51.181,40.005 v1(56.134,40.005) 51.689,44.45 v1(51.689,56.134) ; U1.27 v1(55.471,62.766)
  Bottom Layer w0.254: v1(51.689,56.134) 55.471,59.916 v1(55.471,62.766) v1@55.499,62.738
MOSI: nrf1.6 U1.28 | length 36.5
  Top Layer w0.254: nrf1.6 47.863,38.211 50.292,40.64 53.213,40.64 v1(53.34,40.767) ; U1.28 54.63,63.266 54.864,63.5 v1(54.864,63.627)
  Bottom Layer w0.254: v1(53.34,40.767) 52.832,40.767 49.149,44.45 49.149,54.487 51.427,56.766 51.559,56.766 54.839,60.046 54.839,63.602 v1(54.864,63.627)
Net1_K: 1.K R3.2 | length 2.3
  Top Layer w0.254: R3.2 1.K
Net2_K: 2.K R5.2 | length 2.3
  Top Layer w0.254: 2.K R5.2 R5.2@69.596,53.975
Net3_A: 3.A R6.1 | length 2.4
  Top Layer w0.254: R6.1 3.A
Net4_A: 4.A R9.1 | length 2.4
  Top Layer w0.254: 4.A R9.1
Net*1_2: *1.2 R1.2 | length 4.1
  Top Layer w0.254: *1.2 *1.2@66.421,64.389 ; *1.2@66.421,64.516 *1.2@66.421,64.389 ; R1.2 68.715,66.683 *1.2@66.421,64.389
Net*1_6: *1.6 R3.1 | length 4.4
  Top Layer w0.254: R3.1 65.151,58.047 *1.6
Net*1_7: *1.7 R5.1 | length 4.7
  Top Layer w0.254: *1.7 66.421,58.682 R5.1
Netb1_1: b1.1 Q1.6 | length 2.7
  Top Layer w0.254: Q1.6 35.941,59.497 b1.1
NetC11_2: C11.2@63.754,66.159 U*1.6 | length 4.8
  Top Layer w0.254: v1(65.024,65.786) 65.278,65.532 v1(66.675,65.532)
  Bottom Layer w0.254: C11.2@63.754,66.159 64.651,66.159 v1(65.024,65.786) ; U*1.6 66.405,65.262 v1(66.675,65.532)
NetDR1_3: DR1.3 R14.1 | length 3.4
  Bottom Layer w0.254: DR1.3 29.968,46.851 R14.1
NetDR1_6: DR1.6 R13.1 | length 3.3
  Bottom Layer w0.254: DR1.6 14.458,36.207 R13.1
NetDR2_3: DR2.3 R16.1 | length 3.4
  Bottom Layer w0.254: DR2.3 91.044,46.982 R16.1
NetDR2_6: DR2.6 R15.1 | length 7.8
  Top Layer w0.254: DR2.6 78.72,33.802 v1(78.867,33.655)
  Bottom Layer w0.254: v1(78.867,33.655) 78.867,33.909 78.986,34.028 R15.1
Netkey1_1: key1.1 R18.1 R19.2 | length 7.2
  Top Layer w0.508: key1.1 83.183,28.315 R18.1 R19.2
Netkey2_1: key2.1 R19.1 R20.2 | length 11
  Top Layer w0.508: key2.1 83.183,22.354 84.201,21.336 86.106,21.336 86.876,20.566 R20.2 86.876,22.987 R19.1
Netkey3_1: key3.1 R20.1 | length 2.3
  Top Layer w0.508: key3.1 83.491,19.812 R20.1
NetQ1_2: Q1.2 R10.1 | length 6
  Top Layer w0.254: Q1.2 32.953,57.277 33.401,57.725 33.401,58.928 32.504,59.825 R10.1
OSC1: U1.5 X1.1 | length 3.5
  Top Layer w0.254: X1.1 43.107,66.494 43.107,66.191 44.009,65.289 45.076,65.289 U1.5
OSC2: U1.6 X1.2 | length 6.4
  Top Layer w0.254: X1.2 40.145,66.154 40.386,65.913 42.672,65.913 43.819,64.766 U1.6
PUSHKEY: S4.1 U1.45 | length 37
  Top Layer w0.254: U1.45 47.899,69.997 48.006,70.104 v1(48.133,70.104)
  Bottom Layer w0.254: S4.1 23.513,69.853 47.882,69.853 v1(48.133,70.104)
RST: C11.1@42.045,64.77 U1.7 | length 3.3
  Top Layer w0.254: C11.1@42.045,64.77 42.549,64.266 U1.7
SCL: mpu1.3 oled_1.3 U1.33 | length 34.3
  Top Layer w0.254: U1.33 54.336,65.766 54.864,66.294 v1(55.88,66.294)
  Bottom Layer w0.254: oled_1.3 50.419,49.657 51.435,48.641 53.721,48.641 55.245,50.165 55.245,51.181 52.943,53.483 mpu1.3 ; mpu1.3@52.943,53.959 mpu1.3 ; v1(55.88,66.294) 55.95,66.224 55.95,63.931 57.096,62.785 57.357,62.785 57.404,62.738 59.055,62.738 59.817,61.976 59.817,58.039 57.15,55.372 54.46,55.372 mpu1.3
SDA: mpu1.4 oled_1.4 U1.32 | length 26.9
  Top Layer w0.254: U1.32 53.222,65.289 54.501,65.289 54.617,65.405 54.991,65.405 v1(55.118,65.532)
  Bottom Layer w0.254: oled_1.4 52.959,51.299 mpu1.4 51.061,53.855 53.086,55.88 56.95,55.88 59.363,58.293 59.363,61.595 58.732,62.226 57.012,62.226 55.496,63.743 55.496,65.154 v1(55.118,65.532)
SWCLK: J2.2 U1.37 | length 26.9
  Top Layer w0.254: U1.37 52.846,68.566 v1(52.959,68.453)
  Bottom Layer w0.254: J2.2 32.385,67.945 33.02,68.58 35.56,68.58 36.195,67.945 36.195,65.659 36.576,65.278 48.133,65.278 49.784,66.929 51.435,66.929 v1(52.959,68.453)
SWDIO: J2.3 U1.34 | length 20.7
  Top Layer w0.254: v1(51.336,66.266) U1.34
  Bottom Layer w0.254: J2.3 34.925,65.786 36.068,64.643 48.387,64.643 50.01,66.266 v1(51.336,66.266) v1@51.308,66.294
U_RST: R8.2 U*1.9 | length 2.6
  Bottom Layer w0.254: U*1.9 68.85,62.595 69.596,61.849 R8.2
USART1_RX: J3.1 U1.31 U*1.26 | length 61.3
  Top Layer w0.254: U1.31 53.222,64.789 56.407,64.789 v1(56.642,65.024) ; v1(60.579,62.611) 60.579,63.373 v1(61.468,64.262) ; v1(77.216,55.372) 78.359,56.515 78.359,56.585 v1(78.33,56.613) ; v1(81.153,59.182) 86.233,59.182 87.503,60.452 J3.1
  Bottom Layer w0.254: v1(56.642,65.024) 56.642,63.881 57.284,63.239 59.951,63.239 v1(60.579,62.611) 60.706,62.484 60.706,53.213 60.76,53.159 60.76,53.152 62.985,50.927 69.215,50.927 70.773,52.485 70.773,56.748 72.149,55.372 v1(77.216,55.372) ; v1(61.468,64.262) 61.595,64.262 61.976,63.881 61.976,62.484 62.365,62.095 U*1.26 ; v1(78.33,56.613) 80.899,59.182 v1(81.153,59.182)
USART1_TX: J3.2 U1.30 U*1.25 | length 56.9
  Top Layer w0.254: U1.30 53.203,64.262 v1(57.531,64.262) ; v1(67.945,51.562) 68.126,51.743 70.419,51.743 71.882,53.206 71.882,57.658 73.66,59.436 v1(74.168,59.436) ; v1(81.788,60.071) 84.582,60.071 87.503,62.992 J3.2
  Bottom Layer w0.254: v1(57.531,64.262) 57.658,64.389 60.198,64.389 61.214,63.373 61.214,61.849 ; U*1.25 61.468,61.595 61.214,61.849 ; v1(67.945,51.562) 67.945,51.689 67.437,52.197 62.357,52.197 61.214,53.34 61.214,61.849 ; v1(74.168,59.436) 76.962,59.436 77.597,60.071 v1(81.788,60.071)
USART3_RX: J4.2 U1.22 | length 49.6
  Top Layer w0.254: J4.2 11.176,62.738 13.462,60.452 26.289,60.452 31.242,55.499 35.052,55.499 37.338,57.785 v1(42.418,57.785) ; U1.22 50.899,58.212 v1(51.199,57.912)
  Bottom Layer w0.254: v1(42.418,57.785) 42.545,57.658 43.434,58.547 50.564,58.547 v1(51.199,57.912)
USART3_TX: J4.1 U1.21 | length 49
  Top Layer w0.254: J4.1 9.271,59.817 25.654,59.817 30.734,54.737 35.814,54.737 37.846,56.769 v1(42.926,56.769) ; U1.21 50.399,56.916 v1(50.419,56.896)
  Bottom Layer w0.254: v1(42.926,56.769) 43.942,57.785 49.53,57.785 v1(50.419,56.896)
USB_5V: 1.A 2.A *1.4 *1.8 C4.1 C9.1 C10.2 port1.1 R8.1 S1.6 U*1.7 U*1.8 | length 118.5
  Top Layer w0.254: v1(61.722,69.596) v1(70.993,69.596) ; 66.802,55.38 66.683,55.38 ; 2.A@67.31,55.38 66.683,55.38 ; *1.8 69.536,57.023 70.231,57.023 70.866,56.388 70.866,52.832 70.231,52.197 66.548,52.197 66.04,52.705 66.04,54.737 ; 66.04,54.737 65.397,55.38 66.683,55.38 ; 66.04,54.737 66.683,55.38
  Top Layer w0.508: S1.6 45.339,27.917 45.339,30.48 47.498,32.639 55.118,32.639 59.817,37.338 59.817,64.135 61.087,65.405
  Top Layer w0.762: 61.087,65.405 63.619,65.405 ; v1(61.595,66.802) v1(62.484,66.802) 62.738,67.056 C4.1 63.619,65.405 ; *1.4 63.619,64.33 63.619,65.405
  Bottom Layer w0.254: U*1.7 U*1.8 69.564,63.095 C9.1 69.969,68.572 v1(70.993,69.596) ; v1(69.469,57.023) 69.596,57.15 R8.1 C10.2 ; v1@70.929,69.532 72.898,67.564 72.898,61.087 C10.2@71.56,59.749
  Bottom Layer w0.762: v1(61.595,66.802) v1(62.484,66.802) ; v1@61.722,66.802 61.722,69.787 port1.1@62.831,70.896
VCC_BAT: J1.2 R2.2 S1.1 | length 28.9
  Bottom Layer w0.762: S1.1 49.181,29.75 50.165,30.734 61.595,30.734 66.429,25.9 R2.2 ; R2.2@67.937,25.9 66.929,24.892 66.929,22.479 J1.2
VIN: C1.1 C2.1 C6.1 C7.1 D1.3 D2.3 S1.2 S1.5 | length 61.5
  Bottom Layer w0.762: C6.1 16.403,27.65 D1.3 15.621,25.654 C7.1 20.193,25.654 20.955,24.892 20.955,21.59 21.844,20.701 30.038,20.701 34.069,24.732 ; C1.1 29.075,27.912 D2.3 27.912,25.789 C2.1 30.599,25.908 32.893,25.908 34.069,24.732 ; S1.5 S1.5@49.181,25.749 ; S1.2 52.705,27.051 52.705,25.146 52.197,24.638 50.292,24.638 S1.5@49.181,25.749 ; 34.069,24.732 48.481,24.732 49.181,25.432 S1.5@49.181,25.749
W_CE: nrf1.3 U1.18 | length 40.4
  Top Layer w0.254: U1.18 48.876,60.443 48.876,58.02 46.482,55.626 44.704,55.626 44.069,54.991 44.069,48.768 40.894,45.593 40.894,35.433 42.926,33.401 48.863,33.401 nrf1.3
W_CSN: nrf1.4 U1.25 | length 37.3
  Top Layer w0.254: nrf1.4 52.205,39.243 v1(59.055,39.243) 59.055,40.513 56.769,42.799 56.769,56.769 57.15,57.15 v1(57.15,57.404) ; U1.25 54.312,61.766 54.61,61.468 v1(57.531,61.468)
  Bottom Layer w0.254: v1(57.15,57.404) 57.531,57.785 v1(57.531,61.468)
W_IRQ: nrf1.8 U1.19 | length 27.5
  Top Layer w0.254: nrf1.8 41.91,40.854 41.91,44.704 46.736,49.53 46.736,54.737 49.399,57.4 U1.19
W_SCK: nrf1.5 U1.26 | length 41.6
  Top Layer w0.254: nrf1.5 48.53,34.941 49.784,36.195 57.023,36.195 57.658,36.83 v1(57.658,38.354) ; U1.26 55.078,62.266 55.209,62.134 56.103,62.134 v1(56.134,62.103) ; v1(54.356,56.515) 54.229,56.515 54.229,43.561 57.15,40.64 v1(57.531,40.64)
  Bottom Layer w0.254: v1(54.356,56.515) 56.134,58.293 v1(56.134,62.103) v1@56.261,62.23 ; v1(57.531,40.64) 57.785,40.386 57.785,38.481 v1(57.658,38.354)
pads on no net: *1.1 DR1. DR2. mpu1.5 mpu1.6 mpu1.7 mpu1.8 port1. port1.4 port1.6 Q1.3 Q1.4 Q1.5 S1. S1.4 S2.2 S3.2 S4. U1.2 U1.3 U1.15 U1.17 U1.29 U1.38 U1.42 U*1.0 U*1.1 U*1.2 U*1.3 U*1.10 U*1.11 U*1.12 U*1.13 U*1.14 U*1.15 U*1.16 U*1.17 U*1.18 U*1.19 U*1.20 U*1.21 U*1.22 U*1.23 U*1.24 U*1.27 U*1.28 滚轮编码器_1.

## Polygon pours and split planes (outlines as drawn)
GND on Bottom Layer "Top Layer-No Net" (solid, remove dead copper, pour order 7): 2.413,73.279 3.429,73.787 6.477,75.184 9.779,76.454 12.319,77.216 14.605,77.851 16.256,78.232 18.034,78.613 20.193,78.994 20.574,78.994 21.082,78.994 21.971,78.867 22.86,78.613 23.622,78.232 24.384,77.724 25.019,77.343 25.908,76.835 28.829,74.803 69.596,74.803 70.485,75.565 73.787,77.724 74.803,78.232 76.073,78.74 77.089,78.867 78.359,78.867 80.899,78.486 84.963,77.47 90.17,75.819 95.631,73.406 96.393,72.898 96.901,72.136 97.155,71.501 97.663,57.277 97.663,51.943 97.917,42.672 97.917,36.576 97.917,17.399 97.917,12.319 97.79,6.858 97.663,1.778 97.663,-1.651 97.282,-4.191 96.266,-8.763 94.615,-13.208 93.853,-14.224 92.837,-14.605 91.948,-14.732 90.932,-14.732 89.916,-14.605 88.9,-14.224 87.884,-13.462 85.471,-12.065 82.804,-10.16 80.137,-7.62 77.851,-5.08 76.454,-3.048 75.565,-1.651 71.755,5.588 68.326,13.081 65.913,19.177 64.77,21.463 63.754,22.352 62.738,22.86 35.687,22.86 34.417,22.225 33.528,21.463 32.258,19.05 29.718,12.573 27.813,8.382 26.162,4.953 24.638,1.778 22.225,-2.54 21.59,-3.556 20.701,-4.826 19.177,-6.604 16.637,-9.144 14.097,-11.176 11.176,-13.081 10.16,-13.716 9.271,-14.224 8.382,-14.605 7.493,-14.732 6.477,-14.732 5.461,-14.605 4.572,-14.224 3.937,-13.589 2.921,-11.303 2.159,-9.398 1.397,-6.477 0.762,-2.921 0.508,3.048 0.381,11.049 0.254,27.94 0.381,38.227 0.508,46.355 0.635,55.88 1.143,70.231 1.27,71.755 1.651,72.644 2.286,73.279
GND on Top Layer "Top Layer-No Net" (solid, remove dead copper, pour order 9): 2.286,73.279 2.413,73.279 7.112,75.438 9.779,76.454 14.097,77.724 17.907,78.613 20.32,78.994 21.209,78.994 21.971,78.867 22.86,78.613 24.384,77.724 25.781,76.962 28.829,74.803 69.596,74.803 70.739,75.692 73.66,77.597 75.184,78.359 76.073,78.74 77.343,78.867 78.486,78.867 81.153,78.486 84.963,77.47 90.17,75.819 95.504,73.533 96.393,73.025 97.028,71.882 97.155,71.374 97.663,59.436 97.663,53.467 97.917,42.291 98.044,36.703 98.044,32.385 98.044,27.051 97.917,14.478 97.917,8.763 97.79,2.667 97.663,-2.286 97.028,-5.842 96.266,-8.89 94.996,-12.446 94.488,-13.589 93.599,-14.351 92.329,-14.732 91.059,-14.732 89.408,-14.478 88.011,-13.589 86.233,-12.573 83.185,-10.414 80.264,-7.747 77.978,-5.207 76.581,-3.302 72.517,3.937 70.104,9.144 67.056,16.256 66.167,18.669 65.024,21.082 64.008,22.098 62.865,22.733 62.611,22.86 35.56,22.86 34.417,22.225 33.528,21.336 32.258,18.796 28.575,9.906 25.4,3.302 22.225,-2.54 20.193,-5.334 17.526,-8.255 14.605,-10.795 11.938,-12.573 9.779,-13.97 8.636,-14.478 7.239,-14.732 5.461,-14.605 4.572,-14.224 3.81,-13.335 3.175,-12.192 2.794,-11.049 2.286,-9.652 1.778,-7.747 1.27,-5.588 0.762,-2.921 0.635,0 0.508,4.191 0.381,12.065 0.381,15.875 0.381,19.431 0.381,25.781 0.381,44.577 0.508,48.641 0.635,52.324 0.762,58.547 0.889,61.976 1.016,65.659 1.397,71.628 1.778,72.771 2.286,73.279

## Silkscreen, mask and mechanical layers (free items; w line width, h text height)
Top Overlay:
  lines w0.254: 16.383,52.705 16.764,53.34 ; 17.145,52.705 16.764,53.34 ; 20.066,49.022 20.701,49.403 ; 20.066,49.784 20.701,49.403 ; 49.555,56.49 50.292,55.753 ; 81.026,52.832 81.407,53.467 ; 81.788,52.832 81.407,53.467 ; 84.709,49.149 85.344,49.53 ; 84.709,49.911 85.344,49.53 ; 16.764,53.34 16.764,49.403 20.701,49.403 ; 81.407,53.467 81.407,49.53 85.344,49.53
  text "UP/DOWN" at 75.946,77.47 h0.76 r345
  text "OK\CANCEL" at 16.383,76.073 h0.76 r15
  text "1" at 78.994,74.422 h0.76 r355
  text "1" at 19.177,74.295 h0.76 r5
  text "AUX2" at 87.503,73.279 h0.76 r355
  text "AUX1" at 8.636,72.771 h0.76 r5
  text "3.3" at 30.734,72.644 h0.76 r90
  text "SIO" at 33.147,72.644 h0.76 r90
  text "SCK" at 35.433,72.644 h0.76 r90
  text "GND" at 37.846,72.644 h0.76 r90
  text "104" at 42.672,71.628 h0.76
  text "1K" at 29.083,70.993 h0.76 r90
  text "1K" at 39.497,70.993 h0.76 r90
  text "PWR" at 26.924,69.596 h0.76
  text "LED" at 38.989,69.596 h0.76
  text "104" at 56.769,69.596 h0.76
  text "0" at 19.431,68.707 h0.76 r5
  text "0" at 78.486,68.707 h0.76 r355
  text "3.3_2" at 91.44,68.707 h0.76
  text "104" at 63.246,68.326 h0.76
  text "8M_3P" at 39.243,68.199 h0.76
  text "1.2K" at 66.802,68.199 h0.76
  text "3.3_1" at 3.81,67.437 h0.76
  text "GND" at 91.44,65.151 h0.76
  text "GND" at 4.826,64.77 h0.76
  text "STM32" at 47.625,64.516 h0.76
  text "104" at 36.703,64.389 h0.76
  text "1K" at 32.004,63.373 h0.76
  text "C8T6" at 48.006,63.246 h0.76
  text "TX1" at 91.567,62.484 h0.76
  text "RX3" at 4.826,62.357 h0.76
  text "104" at 36.068,62.103 h0.76
  text "TP4056" at 68.834,61.722 h0.76
  text "TX3" at 4.826,59.817 h0.76
  text "RX1" at 91.567,59.817 h0.76
  text "104" at 54.102,59.309 h0.76
  text "RDY" at 63.881,57.023 h0.76
  text "CHR" at 66.421,57.023 h0.76
  text "SDA" at 49.403,56.642 h0.76 r90
  text "SCL" at 53.213,55.499 h0.76 r90
  text "GND" at 55.753,55.372 h0.76 r90
  text "3.3_1" at 58.674,55.372 h0.76 r90
  text "LMBT3906" at 30.353,54.737 h0.76
  text "1K" at 61.595,53.975 h0.76 r90
  text "1K" at 71.628,53.975 h0.76 r90
  text "PITCH" at 77.47,51.689 h0.76
  text "THR" at 13.97,50.419 h0.76
  text "ROLL" at 81.788,48.26 h0.76
  text "YAW" at 16.129,48.006 h0.76
  text "GND" at 49.149,46.99 h0.76 r90
  text "SCL" at 50.8,46.99 h0.76 r90
  text "SDA" at 53.34,46.99 h0.76 r90
  text "3.3_2" at 45.72,45.593 h0.76 r90
  text "PIT" at 72.898,29.083 h0.76
  text "10K" at 88.392,28.956 h0.76
  text "10K" at 88.392,25.908 h0.76
  text "ROL" at 72.898,24.384 h0.76
  text "OFF/CHARGE" at 38.862,22.987 h0.76
  text "ON" at 56.261,22.987 h0.76
  text "10K" at 88.392,22.733 h0.76
  text "YAW" at 72.898,19.685 h0.76
  text "10K" at 88.519,19.558 h0.76
Bottom Overlay:
  lines w0.254: 73.406,19.939 97.028,19.939 97.028,58.801 73.406,58.801 73.406,19.939
  text "USB" at 65.278,73.152 h0.76
  text "3.3_1" at 29.464,68.834 h0.76 r270
  text "SWIO" at 32.004,68.834 h0.76 r270
  text "SWCLK" at 34.544,68.834 h0.76 r270
  text "GND" at 37.084,68.834 h0.76 r270
  text "104" at 64.897,68.834 h0.76
  text "3.3_2" at 94.996,68.707 h0.76
  text "little_key" at 23.368,67.564 h0.76 r20
  text "3.3_1" at 6.985,67.437 h0.76
  text "rollkey_7mm" at 83.058,66.294 h0.76 r340
  text "10K" at 75.184,65.659 h0.76
  text "NRF24l01" at 51.689,65.532 h0.76
  text "GND" at 93.472,65.024 h0.76
  text "GND" at 6.858,64.77 h0.76
  text "104" at 71.628,64.643 h0.76
  text "10K" at 80.264,63.373 h0.76
  text "RX3" at 6.858,62.357 h0.76
  text "TX1" at 93.218,62.357 h0.76
  text "BEEP" at 34.925,61.722 h0.76
  text "CP2102" at 67.437,61.341 h0.76
  text "10uf" at 75.057,60.071 h0.76
  text "TX3" at 6.858,59.817 h0.76
  text "RX1" at 93.218,59.817 h0.76
  text "10K" at 70.612,57.912 h0.76
  text "10K" at 30.861,50.038 h0.76
  text "10K" at 94.869,44.577 h0.76
  text "by 嘉宏" at 52.451,44.196 h1.6
  text "2017.03.02" at 52.451,42.926 h1.2
  text "IRQ" at 44.958,38.989 h0.76 r270
  text "MOSI" at 47.498,38.989 h0.76 r270
  text "CSN" at 50.038,38.989 h0.76 r270
  text "3.3_2" at 52.578,38.989 h0.76 r270
  text "10K" at 13.208,35.56 h0.76
  text "10K" at 83.693,35.433 h0.76
  text "CE" at 50.038,31.877 h0.76 r270
  text "GND" at 52.578,31.242 h0.76 r270
  text "SCK" at 47.498,31.115 h0.76 r270
  text "MISO" at 44.958,30.861 h0.76 r270
  text "104" at 18.415,29.21 h0.76
  text "104" at 30.734,29.21 h0.76
  text "10K" at 69.088,28.956 h0.76
  text "10K" at 72.136,28.956 h0.76
  text "104" at 24.892,26.797 h0.76
  text "104" at 12.7,26.67 h0.76
  text "0" at 71.882,22.987 h0.76
  text "10UF" at 19.177,21.844 h0.76
  text "10UF" at 31.75,21.844 h0.76
  text "ME6206" at 15.494,21.336 h0.76
  text "ME6206" at 27.94,21.209 h0.76
  text "BAT+" at 69.469,18.415 h0.76
Mechanical 1:
  lines w0.254: 0.414,-1.527 ccw(c40.767,2.667) 3.405,-13.145 ; 0.463,-1.522 cw(c1178.052,26.543) 0.968,70.995 ; 0.983,70.736 cw(c3.937,70.993) 2.039,73.271 ; 2.032,73.279 cw(c28.829,21.082) 20.478,79.159 ; 3.228,-12.592 ccw(c6.268,-11.8) 6.985,-14.859 ; 5.725,-14.817 ccw(c6.988,-9.65) 10.367,-13.758 ccw(c-6.35,16.51) 21.966,-3.334 ccw(c-107.315,70.993) 32.152,18.201 ; 20.067,79.116 cw(c20.701,73.279) 24.384,77.851 ; 24.078,78.114 cw(c5.198,43.937) 28.872,74.987 69.469,74.987 ; 32.151,18.202 33.259,20.5 cw(c36.451,19.273) 35.687,22.606 ; 35.812,22.629 62.486,22.629 ; 62.487,22.632 cw(c61.847,19.273) 65.039,20.5 66.147,18.202 ; 66.146,18.201 ccw(c205.613,70.993) 76.332,-3.334 ccw(c104.648,16.51) 87.931,-13.758 ccw(c91.31,-9.65) 92.573,-14.817 ; 69.426,74.987 cw(c93.1,43.937) 74.22,78.114 ; 73.914,77.851 cw(c77.597,73.279) 78.231,79.116 ; 77.82,79.159 cw(c69.469,21.082) 96.266,73.279 ; 91.313,-14.859 ccw(c92.03,-11.8) 95.07,-12.592 ; 94.893,-13.145 ccw(c57.531,2.667) 97.884,-1.527 ; 96.259,73.271 cw(c94.361,70.993) 97.315,70.736 ; 97.33,70.995 cw(c-1079.754,26.543) 97.835,-1.522
Mechanical 13:
  lines w0.254: -0.889,-17.196 -0.889,82.804 99.111,82.804 99.111,-17.196 -0.889,-17.196
Mechanical 15:
  lines w0.254: -1.056,-0.346 0.033,-1.527 ; -1.01,0.789 0.033,-1.527 ; -0.199,-1.632 0.264,-1.423 ; -0.13,0.071 0.033,-1.527 ; 5.864,-15.09 6.328,-14.882 ; 5.948,-15.16 6.244,-15.574 ; 6.259,-16.584 6.096,-14.986 ; 7.041,-14.068 6.096,-15.367 ; 7.139,-17.302 6.096,-14.986 ; 7.185,-16.167 6.096,-14.986 ; 7.631,-14.895 6.096,-15.367 ; 7.671,-14.242 6.096,-15.367 ; 16.891,49.022 16.891,49.53 ; 18.415,48.768 16.891,49.276 ; 18.415,49.784 16.891,49.276 ; 20.523,-5.062 22.098,-3.937 ; 20.563,-4.409 22.098,-3.937 ; 21.153,-5.236 22.098,-3.937 ; 21.95,-3.73 22.246,-4.144 ; 22.012,-4.044 22.479,-4.243 ; 22.377,-2.543 22.246,-4.144 ; 23.312,-2.942 22.246,-4.144 ; 24.861,1.979 22.246,-4.144 ; 31.166,16.737 33.782,22.86 ; 32.716,21.658 33.782,22.86 ; 33.548,22.96 34.016,22.76 ; 33.65,21.259 33.782,22.86 ; 41.062,49.276 16.891,49.276 ; 57.109,49.276 81.28,49.276 ; 67.243,73.833 69.469,75.057 ; 67.889,74.768 69.469,75.057 ; 68.378,73.877 69.469,75.057 ; 69.347,75.28 69.591,74.834 ; 76.967,79.471 77.211,79.025 ; 77.009,79.007 77.169,79.489 ; 78.18,80.428 77.089,79.248 ; 78.374,78.284 77.089,79.248 ; 78.669,79.537 77.089,79.248 ; 78.695,79.248 77.089,79.248 ; 79.315,80.472 77.089,79.248 ; 79.383,78.483 77.089,79.248 ; 79.756,48.768 81.28,49.276 ; 79.756,49.784 81.28,49.276 ; 81.28,49.022 81.28,49.53 ; 94.607,73.409 96.901,72.644 ; 95.295,72.644 96.901,72.644 ; 95.616,73.608 96.901,72.644 ; 96.821,72.403 96.981,72.885
  text "20.884 (mm)" at 79.335,77.536 h1.52 r341.57
  text "8.696 (mm)" at 68.901,70.571 h1.52 r28.81
  text "64.389 (mm)" at 41.316,48.362 h1.52
  text "29.365 (mm)" at 25.802,1.854 h1.52 r66.87
  text "14.761 (mm)" at -3.357,-2.906 h1.52 r294.25
  text "19.665 (mm)" at 8.409,-14.838 h1.52 r35.54

## Dimensions
34.163,23.114 to 64.14,22.738 on Mechanical 15
28.872,74.987 to 69.469,74.987 on Mechanical 15
1.841,73.089 to 0.414,-1.527 on Mechanical 15

## Text inside footprints (layer, text, board x,y; h text height)
port1: Bottom Overlay "+" at 60.962,70.802 h1 r180